# Altium PCB V_7.PcbDoc
Units mm, origin at the board's own origin, x right, y up, seen from the top; angles counter-clockwise.
Board outline 70 x 20 mm, 2 copper layers (Top Layer, Bottom Layer); 6 components, 10 nets, 80 pads, 1 vias.
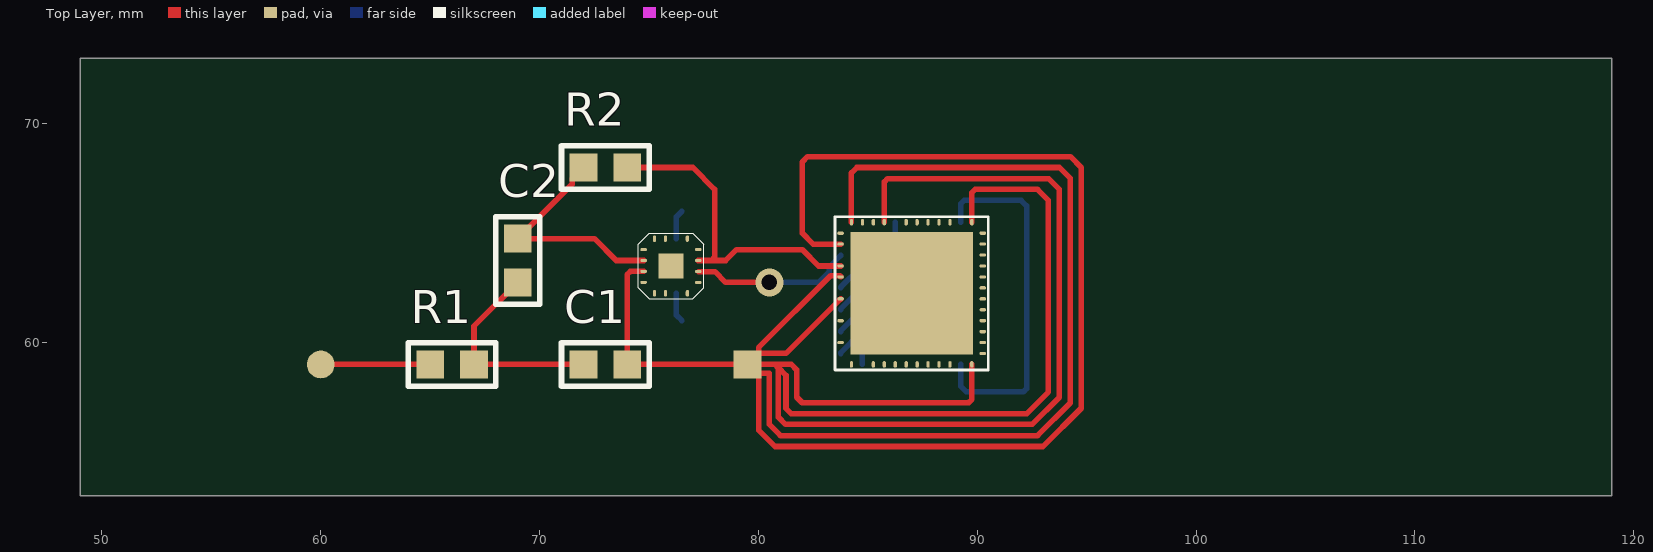
[diagram p0: Top Layer view]
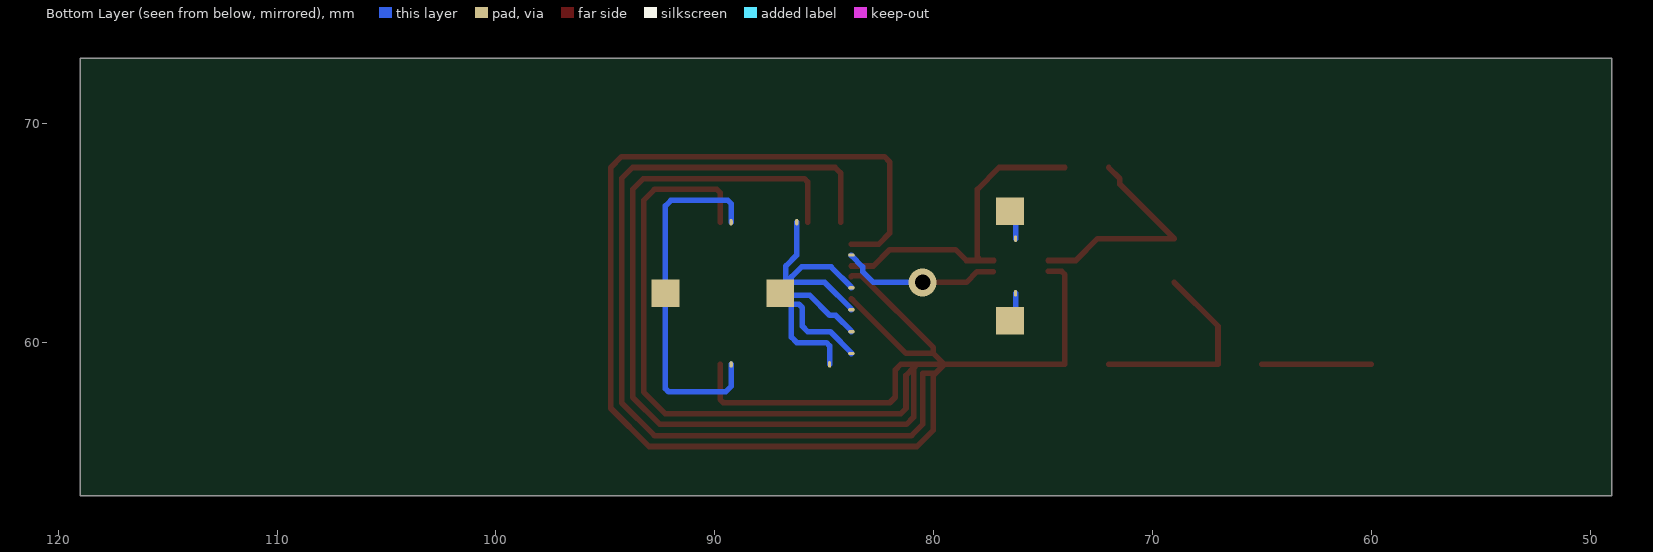
[diagram p1: Bottom Layer view, seen from below]

## Layer stack, top to bottom
Top Solder: solder mask 0.0102, Solder Resist, Dk 3.5
Top Layer: signal copper 0.0356
Dielectric 1: dielectric 0.32, FR-4, Dk 4.8
Bottom Layer: signal copper 0.0356
Bottom Solder: solder mask 0.0102, Solder Resist, Dk 3.5

## Board outline
49,53 119,53 119,73 49,73

## Design rules (kind name [scope] priority, off if disabled: settings)
Clearance [All] p1: gap=0.15 ignorepadtopadclearanceinfootprint=FALSE except(0: Arc-Hole Track-Hole SMDPad-Hole THPad-Hole Via-Hole Fill-Hole Poly-Hole Region-Hole Text-Hole)
PolygonConnect [All] p1: connectstyle=Relief reliefconductorwidth=0.15 reliefentries=4 polygonreliefangle="90 Angle" airgapwidth=0.15
RoutingVias [All] p1: holewidth=0.711 width=1.27 viastyle="Through Hole" minholewidth=0.711 minwidth=1.27 maxholewidth=0.711 maxwidth=1.27
SolderMaskExpansion [All] p1: expansion=0.102
Width [All] p1: maxlimit=0.254 minlimit=0.254 preferedwidth=0.254
30 further rules are at their usual default settings.

## Components (designator, comment, footprint, x,y, rotation, side; value= is the part's Value field where it differs from the comment)
C1 "2p" C 74,59 r180 top
C2 "2p2" C 69,62.75 r90 top
R1 "8k2" R 65,59 r0 top
R2 "2k" R 72,68 r0 top
? "ADA4932-1" ADA 76,63.5 r0 top
? "ADS6B49" ADS 87,62.25 r270 top

## Footprints (in the part's own frame and the unit in brackets; to place one, negate y for a bottom-side part, rotate by r counter-clockwise, add the part's x,y. Pads: shape width x height; smd on the part's side, far side on the other; paste and mask are expansions set on the pad)
ADA [mm]
  oval 0.3x0.15 smd: 1(-1.25,0.75) 2(-1.25,0.25) 3(-1.25,-0.25) 4(-1.25,-0.75) 9(1.25,-0.75) 10(1.25,-0.25) 11(1.25,0.25) 12(1.25,0.75)
  oval 0.15x0.3 smd: 5(-0.75,-1.25) 6(-0.25,-1.25) 8(0.75,-1.25) 13(0.75,1.25) 15(-0.25,1.25) 16(-0.75,1.25)
  oval 0.15x0.3 smd far side: 7(0.25,-1.25) 14(0.25,1.25)
  rect 1.15x1.15 smd: ""(0,0)
  silkscreen extent -1.5,-1.5 1.5,1.5
ADS [mm]
  oval 0.3x0.15 smd: 1(-3.25,2.75) 3(-3.25,1.75) 4(-3.25,1.25) 5(-3.25,0.75) 6(-3.25,0.25) 7(-3.25,-0.25) 9(-3.25,-1.25) 10(-3.25,-1.75) 11(-3.25,-2.25) 12(-3.25,-2.75) 25(3.25,-2.75) 27(3.25,-1.75) 28(3.25,-1.25) 29(3.25,-0.75) 30(3.25,-0.25) 31(3.25,0.25) 32(3.25,0.75) 33(3.25,1.25) 34(3.25,1.75) 36(3.25,2.75)
  oval 0.3x0.15 smd far side: 2(-3.25,2.25) 8(-3.25,-0.75) 26(3.25,-2.25) 35(3.25,2.25)
  oval 0.15x0.3 smd: 13(-2.75,-3.25) 14(-2.25,-3.25) 16(-1.25,-3.25) 17(-0.75,-3.25) 19(0.25,-3.25) 21(1.25,-3.25) 23(2.25,-3.25) 37(2.75,3.25) 38(2.25,3.25) 39(1.75,3.25) 40(1.25,3.25) 41(0.75,3.25) 42(0.25,3.25) 43(-0.25,3.25) 44(-0.75,3.25) 45(-1.25,3.25) 46(-1.75,3.25) 47(-2.25,3.25) 48(-2.75,3.25)
  oval 0.15x0.3 smd far side: 15(-1.75,-3.25) 18(-0.25,-3.25) 20(0.75,-3.25) 22(1.75,-3.25) 24(2.75,-3.25)
  rect 5.6x5.6 smd: ""(0,0)
  silkscreen extent -3.5,-3.5 3.5,3.5
C [mm]
  rect 1.27x1.27 smd: 1(0,0) 2(2,0)
  silkscreen extent -1,-1 3,1
R [mm]
  rect 1.27x1.27 smd: 1(0,0) 2(2,0)
  silkscreen extent -1,-1 3,1

## Part data
C1 C2: library part Ñ
R1 R2: library part R
?: library part ADA4932-2

## Free pads (board coordinates)
  round 1.27 smd: 8(60,59)
  rect 1.27x1.27 smd far side: 9(76.5,61) 10(76.5,66) 13(92.25,62.25) 15(87,62.25)
  rect 1.27x1.27 smd: 16(79.5,59)

## Via types
v1: diameter 1.27, hole 0.711, Top Layer to Bottom Layer, 1 vias

## Nets (pads, with @x,y where several pads share a name; then routed paths per layer and width w, separated by ;. In a path a pad name is that pad's centre, name@x,y a point inside that pad or via, vN(x,y) a via of type N, cw(c..) or ccw(c..) an arc to the next point about the centre after c; other vN are vias at no path point)
1.8V: ?.2@89.25,65.5 ?.35 pad.13 | length 16.5
  Bottom Layer w0.254: ?.35 89.25,58 89.5,57.75 92.101,57.75 92.25,57.899 pad.13 92.25,66.25 92,66.5 89.399,66.5 89.25,66.351 ?.2@89.25,65.5
3.3V: ?.8@86.25,65.5 ?.18 ?.20 ?.22 ?.24 ?.26 pad.15 | length 23.3
  Bottom Layer w0.254: ?.24 83.75,59.529 84.721,60.5 85.75,60.5 86,60.75 86,61.601 86.149,61.75 86.5,61.75 86.5,60.25 86.25,60 84.899,60 84.75,59.851 ?.26 ; ?.22 83.75,60.529 84.471,61.25 84.75,61.25 85.654,62.154 86.904,62.154 pad.15 pad.15@86.75,62.5 ; ?.20 83.75,61.529 84.971,62.75 pad.15@86.5,62.75 ; ?.18 83.75,62.529 84.681,63.46 86.029,63.46 86.492,62.997 86.492,62.758 pad.15@86.5,62.75 ; ?.8@86.25,65.5 86.25,64 86.75,63.5 pad.15@86.75,62.5 ; pad.15@86.5,62.75 pad.15@86.75,62.5
+5V: ?.14@76.25,64.75 pad.10 | length 1.4
  Bottom Layer w0.254: ?.14@76.25,64.75 76.25,65.75 pad.10
-5V: ?.7@76.25,62.25 pad.9 | length 1.4
  Bottom Layer w0.254: ?.7@76.25,62.25 76.25,61.25 pad.9
GND: ?.1@89.75,65.5 ?.3@74.75,63.25 ?.9@85.75,65.5 ?.12@84.25,65.5 ?.14@83.75,64.5 ?.17 ?.19 ?.36 C1.1 pad.16 | length 187.3
  Top Layer w0.254: ?.3@74.75,63.25 74.149,63.25 74,63.101 C1.1 pad.16 ; ?.19 83.75,61.971 83.727,61.948 83.698,61.948 81.258,59.508 pad.16@80.008,59.508 ; ?.17 83.75,63.029 83.727,63.052 83.294,63.052 80.008,59.766 pad.16@80.008,59.508 ; ?.14@83.75,64.5 82.5,64.5 82,65 82,68.25 82.25,68.5 94.25,68.5 94.75,68 94.75,57 93,55.25 80.758,55.25 80.008,56 80.008,58.492 pad.16@79.899,58.601 ; ?.12@84.25,65.5 84.25,67.75 84.5,68 93.75,68 94.25,67.5 94.25,57.25 92.75,55.75 81.008,55.75 80.5,56.258 80.5,58.601 pad.16@79.899,58.601 ; ?.9@85.75,65.5 85.75,67.343 85.899,67.492 93.258,67.492 93.75,67 93.75,57.75 93.75,57.5 92.508,56.258 81.242,56.258 80.904,56.596 80.904,58.851 ; ?.36 89.75,57.399 89.601,57.25 82,57.25 81.75,57.5 81.75,58.75 81.5,59 80.755,59 ; ?.1@89.75,65.5 89.75,66.851 89.899,67 92.75,67 93.25,66.5 93.25,57.742 92.25,56.742 81.508,56.742 81.258,56.992 81.258,58.497 80.904,58.851 ; pad.16 80.755,59 ; pad.16 pad.16@79.899,58.601 ; pad.16 pad.16@80.008,59.508 ; 80.755,59 80.904,58.851
Net_2: ?.2@74.75,63.75 C2.2 R2.1 | length 10.7
  Top Layer w0.254: R2.1 71.492,67.492 71.492,67.242 C2.2 72.5,64.75 73.5,63.75 ?.2@74.75,63.75
Net_10: ?.10@77.25,63.25 ?.15@83.75,64 | length 7.3
  Top Layer w0.254: ?.10@77.273,63.242 78.008,63.242 78.5,62.75 v1(80.5,62.75)
  Bottom Layer w0.254: v1(80.5,62.75) 82.75,62.75 83.239,63.239 83.239,63.46 83.75,63.971 ?.15@83.75,64
Net_11: ?.11@77.25,63.75 ?.16@83.75,63.5 R2.2 | length 14.7
  Top Layer w0.254: R2.2 77,68 78,67 78,63.899 77.851,63.75 ; ?.11@77.25,63.75 77.851,63.75 ; ?.16@83.75,63.5 82.75,63.5 82,64.25 79,64.25 78.5,63.75 77.851,63.75
NetC1_2: C1.2 C2.1 R1.2 | length 9.6
  Top Layer w0.254: C2.1 67,60.75 R1.2 C1.2
NetR1_1: pad.8 R1.1 | length 5
  Top Layer w0.254: pad.8 R1.1
pads on no net: ?. ?.1@74.75,64.25 ?.3@88.75,65.5 ?.4 ?.5 ?.6 ?.7@86.75,65.5 ?.8@76.75,62.25 ?.9@77.25,62.75 ?.10@85.25,65.5 ?.11@84.75,65.5 ?.12@77.25,64.25 ?.13 ?.15@75.75,64.75 ?.16@75.25,64.75 ?.21 ?.23 ?.25 ?.27 ?.28 ?.29 ?.30 ?.31 ?.32 ?.33 ?.34 ?.37 ?.38 ?.39 ?.40 ?.41 ?.42 ?.43 ?.44 ?.45 ?.46 ?.47 ?.48

## Polygon pours and split planes (outlines as drawn)
no net on Top Layer (solid, pour order 4): 63.5,57.5
no net on Top Layer (solid, pour order 2): 63.5,57.5
no net on Bottom Layer (solid, pour order 20): 83.239,64
no net on Bottom Layer (solid, pour order 18): 83,64.5